# Altium PCB SKC_PCB.PcbDoc (part 3 of 3)
Units mm, origin at the board's own origin, x right, y up, seen from the top; angles counter-clockwise.
Board outline 160.02 x 100.08 mm, 2 copper layers (Top Layer, Bottom Layer); 399 components, 429 nets, 1319 pads, 182 vias.
Unrouted connection lines stored in the file: 43.
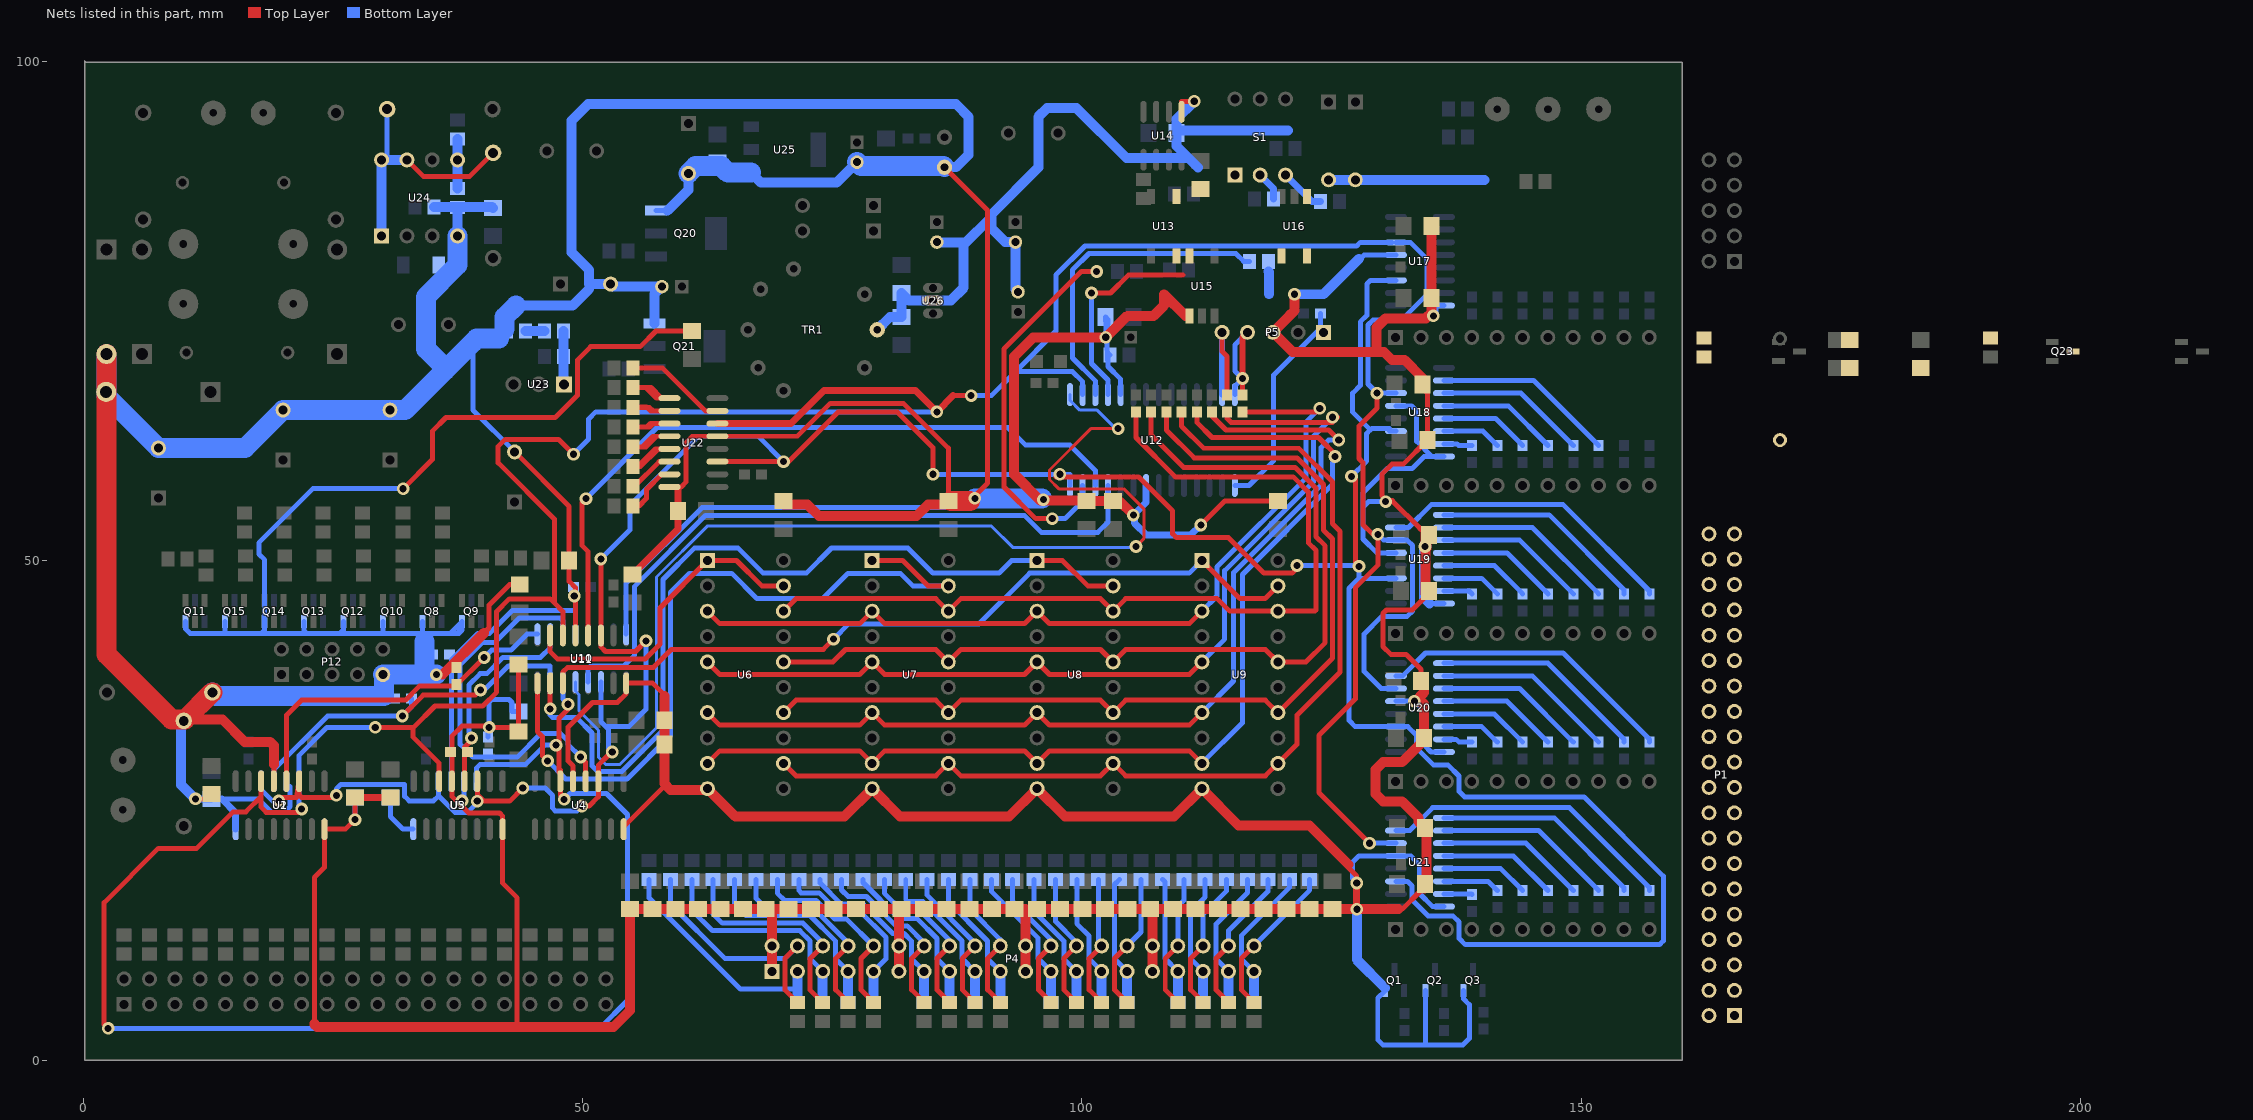
[diagram p3: the nets of this part, all layers, seen from the top]

## Via types
v1: diameter 1.27, hole 0.711, Top Layer to Bottom Layer, 182 vias

## Nets (pads, with @x,y where several pads share a name; then routed paths per layer and width w, separated by ;. In a path a pad name is that pad's centre, name@x,y a point inside that pad or via, vN(x,y) a via of type N, cw(c..) or ccw(c..) an arc to the next point about the centre after c; other vN are vias at no path point) (continued)
NetR147_1: R147.1 U18.2 | length 18.2
  Bottom Layer w0.5: U18.2@136.258,68.072 145.249,68.072 R147.1@151.765,61.556
NetR149_1: R149.1 U18.3 | length 15.1
  Bottom Layer w0.5: U18.3@136.258,66.802 143.979,66.802 R149.1@149.225,61.556
NetR150_1: R150.1 U18.4 | length 12.1
  Bottom Layer w0.5: U18.4@136.258,65.532 142.709,65.532 R150.1@146.685,61.556
NetR151_1: R151.1 U18.5 | length 9
  Bottom Layer w0.5: U18.5@136.258,64.262 141.439,64.262 R151.1@144.145,61.556
NetR152_1: R152.1 U18.6 | length 5.9
  Bottom Layer w0.5: U18.6@136.258,62.992 140.169,62.992 R152.1@141.605,61.556
NetR153_1: R153.1 U18.7 | length 2.9
  Bottom Layer w0.5: U18.7@136.258,61.722 137.566,61.722 137.732,61.556 R153.1@139.065,61.556
NetR154_1: R154.1 U19.15 | length 30.2
  Bottom Layer w0.5: U19.15@131.458,53.34 132.715,53.34 135.001,55.626 148.209,55.626 156.845,46.99 R154.1@156.845,46.697
NetR155_1: R155.1 U19.1 | length 21.6
  Bottom Layer w0.5: U19.1@136.258,54.61 146.812,54.61 154.305,47.117 R155.1@154.305,46.697
NetR156_1: R156.1 U19.2 | length 18.3
  Bottom Layer w0.5: U19.2@136.258,53.34 145.122,53.34 R156.1@151.765,46.697
NetR158_1: R158.1 U19.3 | length 15.2
  Bottom Layer w0.5: U19.3@136.258,52.07 143.852,52.07 R158.1@149.225,46.697
NetR159_1: R159.1 U19.4 | length 12.1
  Bottom Layer w0.5: U19.4@136.258,50.8 142.582,50.8 R159.1@146.685,46.697
NetR160_1: R160.1 U19.5 | length 9.1
  Bottom Layer w0.5: U19.5@136.258,49.53 141.312,49.53 R160.1@144.145,46.697
NetR162_1: R162.1 U19.6 | length 6
  Bottom Layer w0.5: U19.6@136.258,48.26 140.042,48.26 R162.1@141.605,46.697
NetR163_1: R163.1 U19.7 | length 2.9
  Bottom Layer w0.5: U19.7@136.258,46.99 138.772,46.99 R163.1@139.065,46.697
NetR164_1: R164.1 U20.15 | length 30.2
  Bottom Layer w0.5: U20.15@131.458,38.481 132.125,38.481 134.411,40.767 148.209,40.767 156.845,32.131 R164.1@156.845,31.838
NetR165_1: R165.1 U20.1 | length 21.5
  Bottom Layer w0.5: U20.1@136.258,39.751 146.685,39.751 154.305,32.131 R165.1@154.305,31.838
NetR166_1: R166.1 U20.2 | length 18.3
  Bottom Layer w0.5: U20.2@136.258,38.481 145.122,38.481 R166.1@151.765,31.838
NetR168_1: R168.1 U20.3 | length 15.2
  Bottom Layer w0.5: U20.3@136.258,37.211 143.852,37.211 R168.1@149.225,31.838
NetR169_1: R169.1 U20.4 | length 12.1
  Bottom Layer w0.5: U20.4@136.258,35.941 142.582,35.941 R169.1@146.685,31.838
NetR170_1: R170.1 U20.5 | length 9.1
  Bottom Layer w0.5: U20.5@136.258,34.671 141.312,34.671 R170.1@144.145,31.838
NetR172_1: R172.1 U20.6 | length 6
  Bottom Layer w0.5: U20.6@136.258,33.401 140.042,33.401 R172.1@141.605,31.838
NetR173_1: R173.1 U20.7 | length 2.9
  Bottom Layer w0.5: U20.7@136.258,32.131 137.49,32.131 137.783,31.838 R173.1@139.065,31.838
NetR174_1: R174.1 U21.15 | length 29.9
  Bottom Layer w0.5: U21.15@131.458,22.987 132.842,22.987 135.128,25.273 148.844,25.273 156.845,17.272 R174.1@156.845,16.979
NetR175_1: R175.1 U21.1 | length 21.2
  Bottom Layer w0.5: U21.1@136.258,24.257 147.32,24.257 154.305,17.272 R175.1@154.305,16.979
NetR176_1: R176.1 U21.2 | length 18
  Bottom Layer w0.5: U21.2@136.258,22.987 145.757,22.987 R176.1@151.765,16.979
NetR178_1: R178.1 U21.3 | length 14.9
  Bottom Layer w0.5: U21.3@136.258,21.717 144.487,21.717 R178.1@149.225,16.979
NetR179_1: R179.1 U21.4 | length 11.9
  Bottom Layer w0.5: U21.4@136.258,20.447 143.217,20.447 R179.1@146.685,16.979
NetR180_1: R180.1 U21.5 | length 8.8
  Bottom Layer w0.5: U21.5@136.258,19.177 141.947,19.177 R180.1@144.145,16.979
NetR182_1: R182.1 U21.6 | length 5.7
  Bottom Layer w0.5: U21.6@136.258,17.907 140.677,17.907 R182.1@141.605,16.979
NetR183_1: R183.1 U21.7 | length 2.8
  Bottom Layer w0.5: U21.7@136.258,16.637 139.026,16.637 R183.1@139.065,16.598
NetR192_2: R192.2 U22.15 | length 10.2
  Top Layer w0.5: R192.2@55.052,69.342 57.964,69.342 62.282,65.024 62.611,65.024 U22.15@63.487,65.024
NetR194_2: R194.2 U22.1 | length 6.4
  Top Layer w0.5: R194.2@55.052,67.364 56.312,67.364 ; U22.1@58.179,66.294 U22.1@57.912,66.294 ; U22.1@58.687,66.294 U22.1@57.912,66.294 ; 56.312,67.364 57.382,66.294 U22.1@57.912,66.294 ; 56.312,67.364 56.842,67.364 U22.1@57.912,66.294
NetR196_2: R196.2 U22.2 | length 5.9
  Top Layer w0.5: U22.2@58.687,65.024 58.179,65.024 57.03,65.024 ; 56.406,65.387 R196.2@55.052,65.387 55.07,65.405 56.388,65.405 56.406,65.387 ; 56.406,65.387 56.667,65.387 57.03,65.024 ; 56.406,65.387 56.769,65.024 57.03,65.024
NetR199_2: R199.2 U22.3 | length 4.5
  Top Layer w0.5: R199.2@55.052,63.409 56.424,63.409 ; U22.3@58.687,63.754 58.179,63.754 57.038,63.754 ; 56.424,63.409 56.769,63.754 57.038,63.754 ; 56.424,63.409 56.693,63.409 57.038,63.754
NetR201_2: R201.2 U22.4 | length 5.9
  Top Layer w0.5: R201.2@55.052,61.432 55.971,61.432 ; U22.4@58.687,62.484 58.179,62.484 57.389,62.484 ; 55.971,61.432 57.023,62.484 57.389,62.484 ; 55.971,61.432 56.337,61.432 57.389,62.484
NetR203_2: R203.2 U22.5 | length 7.2
  Top Layer w0.5: R203.2@55.052,59.454 R203.2@55.517,59.454 ; R203.2@55.435,59.372 R203.2@55.517,59.454 ; U22.5@58.687,61.214 58.179,61.214 57.531,61.214 ; R203.2@55.517,59.454 55.771,59.454 57.531,61.214 ; R203.2@55.517,59.454 57.277,61.214 57.531,61.214
NetR205_2: R205.2 U22.6 | length 5.4
  Top Layer w0.5: R205.2@55.052,57.477 R205.2@55.187,57.477 ; R205.2@55.341,57.477 R205.2@55.187,57.477 ; U22.6@57.809,59.944 U22.6@58.687,59.944 ; U22.6@58.42,59.944 57.655,59.944 R205.2@55.187,57.477
NetR207_2: R207.2 U22.7 | length 5.5
  Top Layer w0.5: R207.2@55.052,55.499 55.626,55.499 56.388,56.261 56.388,57.15 57.912,58.674 U22.7@58.687,58.674
NetR210_2: R210.2 R211.2 U23.1 | length 5.4
  Bottom Layer w1: R211.2@48.067,73.025 R210.2@48.067,70.485 48.067,67.757 U23.1@48.133,67.691
NetR211_1: R211.1 R213.2 | length 1.9
  Bottom Layer w1: R213.2@44.257,73.025 R211.1@46.167,73.025
NetR214_2: R214.2 R215.2 U24.1 U24.7 U24.8 | length 25.8
  Top Layer w0.5: U24.7@32.385,90.17 34.036,88.519 38.667,88.519 R214.2@41.021,90.873
  Bottom Layer w0.5: U24.8@29.845,90.17 30.412,90.737 R215.2@30.412,95.25
  Bottom Layer w1: U24.1@29.845,82.55 U24.8@29.845,90.17 U24.7@32.385,90.17
NetR216_1: R216.1 R217.2 U24.5 | length 5
  Bottom Layer w1: R217.2@37.465,87.31 U24.5@37.465,90.17 R216.1@37.465,92.268
NetR228_1: R228.1 U16.1 | length 2.3
  Bottom Layer w1: 118.679,78.994 118.745,78.928 118.745,76.708
NetR230_2: R230.2 S1.3 | length 4.6
  Bottom Layer w0.7: S1.3@120.396,88.646 123.063,85.979 R230.2@123.891,85.979
NetR231_1: R231.1 S1.2 | length 3
  Bottom Layer w0.7: S1.2@117.856,88.646 119.187,87.315 R231.1@119.187,86.233
NetR232_2: R232.2 S1.1
SEN_FEEDER1_MIN: P1.20
SH1_LATCH: U10.12 U12.11 | length 68.6
  Bottom Layer w0.5: U10.12@50.546,37.859 50.546,39.218 50.8,39.472 54.115,39.472 55.198,40.555 55.198,47.451 62.302,54.555 94.23,54.555 95.928,52.857 101.6,52.857 102.616,53.873 U12.11@102.616,57.553
SH1_OE: U10.13 U12.15 | length 112.8
  Top Layer w0.3: v1(103.632,63.246) 100.893,63.246 96.751,59.104 96.751,58.153 97.69,57.214 104.191,57.214 106.195,55.21 106.195,52.22 v1(105.41,51.435)
  Bottom Layer w0.3: U10.13@49.276,37.859 49.276,36.957 49.634,36.599 49.634,34.984 51.585,33.033 51.585,30.33 52.324,29.591 53.685,29.591 57.376,33.282 57.376,48.395 62.463,53.482 90.947,53.482 93.064,51.365 105.213,51.365 v1@105.283,51.435 ; U12.15@98.806,66.653 98.806,66.077 99.784,65.099 101.525,65.099 v1@103.378,63.246
SH2_LATCH: U11.12 U12.12 | length 71.4
  Top Layer w0.5: v1(50.317,56.236) 49.911,55.829 49.911,51.562 50.546,50.927 U11.12@50.546,42.532
  Bottom Layer w0.5: v1(50.317,56.236) 57.44,63.358 92.598,63.358 94.361,61.595 98.806,61.595 101.346,59.055 U12.12@101.346,57.553
SH_CLK: U1.11 U2.11 U3.11 U4.11 U5.11 U10.11 U11.11 U12.14 U17.11 U18.11 U19.11 U20.11 U21.11 U22.11 | length 325.5
  Top Layer w0.5: v1(19.558,25.959) 19.888,26.289 21.336,26.289 U2.11@21.59,27.927 21.59,26.568 21.844,26.314 25.121,26.314 v1(25.324,26.518) ; v1(39.433,25.933) 39.433,26.632 ; U3.11@39.433,27.927 39.433,26.632 ; v1(43.993,27.254) 42.672,25.933 40.132,25.933 39.433,26.632 ; v1(49.911,25.451) 50.648,25.451 51.562,26.365 U4.11@51.562,27.927 51.562,29.544 52.578,30.56 v1@52.578,30.988 ; v1(51.816,50.19) U11.11@51.816,42.532 51.816,41.385 52.273,40.928 55.279,40.928 v1(56.337,41.986) ; U22.11@63.487,59.944 v1(70.104,59.944) 70.612,59.944 75.565,64.897 81.534,64.897 85.09,61.341 v1(85.09,58.674) ; v1(97.79,58.674) 97.663,58.674 97.409,58.42 105.664,58.42 109.093,54.991 109.093,52.705 109.474,52.324 114.681,52.324 118.237,48.768 121.056,48.768 121.564,49.276 121.539,49.301 v1(121.539,49.53) ; v1(127,58.471) 127.084,58.471 127.389,58.166 127.389,49.827 v1(127.762,49.454)
  Bottom Layer w0.5: U1.11@17.78,27.927 17.78,27.085 18.906,25.959 v1(19.558,25.959) ; v1(25.324,26.518) 25.324,27.153 25.781,27.61 32.156,27.61 32.156,26.416 32.614,25.959 35.052,25.959 35.56,26.467 ; U5.11@35.56,27.927 35.56,26.467 ; v1(39.433,25.933) 39.433,25.785 38.468,24.82 37.182,24.82 35.56,26.467 ; v1(43.993,27.254) 46.228,27.254 46.99,26.492 46.99,25.222 47.244,24.968 49.428,24.968 v1(49.911,25.451) ; U10.11@51.816,37.859 51.816,33.909 52.578,33.147 52.578,31.242 v1(52.959,30.861) ; v1(51.816,50.19) 54.717,53.091 54.717,55.568 61.633,62.484 67.564,62.484 v1(70.104,59.944) ; 52.324,33.401 54.61,33.401 56.337,35.128 v1(56.337,41.986) ; v1(85.09,58.674) 98.806,58.674 U12.14@98.806,57.553 ; v1(121.539,49.53) 121.539,49.301 121.768,49.53 v1@127.762,49.53 ; v1(127,58.471) 128.524,59.995 128.524,62.763 128.892,63.132 127.127,64.897 127.127,66.802 127.889,67.564 127.889,73.939 128.553,74.603 128.553,77.753 128.905,78.105 U17.11@131.458,78.105 ; v1@127.737,49.454 v1(127.762,49.454) 127.762,48.26 ; 129.032,63.271 130.81,63.271 130.81,62.992 U18.11@131.458,62.992 ; U21.11@131.458,17.907 132.605,17.907 133.062,17.45 133.062,16.052 134.661,14.453 137.16,14.453 137.77,13.843 137.77,12.192 138.405,11.557 157.861,11.557 158.242,11.938 158.242,18.415 150.292,26.365 138.328,26.365 137.77,26.924 137.77,28.448 136.652,29.566 135.205,29.566 133.528,31.242 133.528,32.512 132.639,33.401 U20.11@131.458,33.401 127.373,33.401 126.746,34.028 126.746,47.244 127.762,48.26 ; U19.11@131.458,48.26 127.762,48.26
SH_DATA: U1.14 U2.14 U3.14 U4.14 U5.14 U10.14 U11.14 U12.16 U17.14 U18.14 U19.14 U20.14 U21.14 U22.14 | length 452.3
  Top Layer w0.5: v1(2.458,3.175) 2.056,3.577 2.056,15.772 7.493,21.209 11.322,21.209 14.98,24.867 16.256,24.867 17.78,26.391 ; U2.14@17.78,27.927 17.78,26.391 ; v1(21.844,25.146) 21.514,24.816 18.288,24.816 17.78,25.324 17.78,26.391 ; v1(29.21,33.325) 33.071,33.325 ; U3.14@35.623,27.927 35.623,29.731 33.02,32.334 33.02,33.274 33.071,33.325 ; v1(47.32,31.547) 47.371,31.496 47.117,31.496 v1@47.621,30.992 ; U11.14@48.006,42.532 48.006,44.933 47.18,45.758 ; v1(48.133,26.111) 47.752,26.492 U4.14@47.752,27.927 U4.14@47.752,28.727 ; v1(48.514,35.636) 48.514,35.128 47.621,34.235 v1@47.621,30.992 ; v1(49.073,60.681) 47.574,62.179 42.24,62.179 41.529,61.468 41.529,59.817 47.168,54.178 47.18,45.758 ; 87.097,66.548 v1(88.9,66.548) ; v1(128.809,21.717) 123.727,26.798 123.727,32.516 127.381,36.17 127.381,47.308 129.642,49.569 v1(129.642,52.654) 129.134,52.654 128.143,53.645 128.143,59.859 127.754,60.249 127.754,63.492 129.565,65.303 v1(129.565,66.802) ; 33.071,33.325 35.204,35.458 39.98,35.458 41.377,36.855 41.377,44.929 42.65,46.203 46.736,46.203 47.18,45.758 ; 47.621,29.202 47.752,29.071 U4.14@47.752,28.727 ; 47.621,29.202 47.621,28.858 U4.14@47.752,28.727 ; 47.621,29.202 v1@47.621,30.992
  Top Layer w0.7: U22.14@63.487,63.754 70.866,63.754 74.168,67.056 83.337,67.056 v1(85.471,64.922) 87.097,66.548
  Bottom Layer w0.5: v1(2.458,3.175) 51.689,3.175 54.483,5.969 54.483,24.587 52.375,26.695 48.717,26.695 v1(48.133,26.111) ; v1(21.844,25.146) 21.59,25.4 U1.14@21.59,27.927 21.59,30.531 24.384,33.325 v1(29.21,33.325) ; U5.14@39.37,27.927 39.37,29.277 39.684,29.591 44.24,29.591 46.196,31.547 v1(47.32,31.547) v1@47.371,31.496 ; U10.14@48.006,37.859 48.006,36.144 v1(48.514,35.636) ; v1(49.073,60.681) 50.597,62.205 50.597,64.211 51.308,64.922 v1(85.471,64.922) ; v1(88.9,66.548) 90.932,66.548 93.345,68.961 ; U12.16@100.076,66.653 100.076,67.945 99.06,68.961 93.345,68.961 ; v1(128.809,21.717) U21.14@131.458,21.717 ; v1(129.642,52.654) 130.226,52.07 U19.14@131.458,52.07 132.588,52.07 133.125,51.533 133.125,44.987 132.588,44.45 130.048,44.45 128.27,42.672 128.27,38.913 129.972,37.211 U20.14@131.458,37.211 ; U17.14@131.064,81.915 127.889,81.915 127.524,81.55 100.313,81.55 97.409,78.646 97.409,73.025 93.345,68.961 ; U18.14@131.458,66.802 v1(129.565,66.802) 128.651,67.716 128.651,73.635 129.167,74.151 132.037,74.151 134.586,76.699 134.586,80.222 132.893,81.915 U17.14@131.458,81.915
SIG1_LATCH: R226.1 U1.12 U10.15 | length 36.9
  Top Layer w0.5: v1(31.928,34.468) 34.011,36.551 39.243,36.551 v1(39.751,37.059)
  Bottom Layer w0.5: U1.12@19.05,27.927 19.05,29.063 24.455,34.468 v1(31.928,34.468) 32.854,35.394 R226.1@32.854,36.195 ; v1(39.751,37.059) 40.132,37.059 42.545,39.472 46.736,39.472 U10.15@46.736,37.859
SIG2_LATCH: R225.1 U2.12 U10.1 | length 35.1
  Top Layer w0.5: U2.12@20.32,27.927 20.32,34.54 21.844,36.064 32.254,36.064 33.635,37.445 37.242,37.445 v1(40.123,40.326)
  Bottom Layer w0.5: v1(40.123,40.326) 40.869,41.072 42.824,41.072 44.412,42.659 U10.1@45.466,42.659
SIG3_LATCH: R224.1 U3.12 U10.2 | length 21.8
  Top Layer w0.5: U3.12@38.163,27.927 38.163,31.331 39.091,32.258 v1(38.862,32.258)
  Bottom Layer w0.5: v1(38.862,32.258) 39.091,32.258 39.141,32.309 38.612,32.838 38.612,37.592 39.726,38.706 40.388,38.706 42.001,40.318 45.753,40.318 46.736,41.3 U10.2@46.736,42.659
SIG4_LATCH: R223.1 U4.12 U10.3 | length 39
  Top Layer w0.5: v1(49.784,30.353) 50.292,29.845 U4.12@50.292,27.927
  Bottom Layer w0.5: U10.3@48.006,42.659 48.006,44.018 47.752,44.272 43.647,44.272 41.208,41.834 39.976,41.834 37.723,39.581 37.723,31.619 38.997,30.345 39.372,30.345 43.426,30.345 45.767,32.686 47.792,32.686 48.51,31.968 48.51,31.627 v1(49.784,30.353)
SIG5_LATCH: R222.1 U5.12 U10.4 | length 28.9
  Bottom Layer w0.5: U5.12@36.83,27.927 36.83,40.081 39.497,42.748 40.665,42.748 42.943,45.026 49.149,45.026 49.276,44.899 U10.4@49.276,42.659
SIG_ALARM: P1.4
SIG_CLEANING_MODE: P1.3
SIG_CYCLON_FULL: P1.40
SIG_DOSER1_AUTO: P1.5
SIG_DOSER1_MANUAL: P1.6
SIG_DOSER2_AUTO: P1.7
SIG_DOSER2_MANUAL: P1.8
SIG_DOSER3_AUTO: P1.9
SIG_DOSER3_MANUAL: P1.10
SIG_DOSER4_AUTO: P1.11
SIG_DOSER4_MANUAL: P1.12
SIG_EKSTRUDER_RUN: P1.36
SIG_FEEDER1_FULL: P1.18
SIG_FEEDER1_ON: P1.13
SIG_FEEDER1_REQUEST: P1.19
SIG_FEEDER1_VACUM: P1.17
SIG_FEEDER2_FULL: P1.22
SIG_FEEDER2_MIN: P1.24
SIG_FEEDER2_ON: P1.14
SIG_FEEDER2_REQUEST: P1.23
SIG_FEEDER2_VACUM: P1.21
SIG_FEEDER3_FULL: P1.26
SIG_FEEDER3_MIN: P1.28
SIG_FEEDER3_ON: P1.15
SIG_FEEDER3_REQUEST: P1.27
SIG_FEEDER3_VACUM: P1.25
SIG_FEEDER4_FULL: P1.30
SIG_FEEDER4_MIN: P1.32
SIG_FEEDER4_ON: P1.16
SIG_FEEDER4_REQUEST: P1.31
SIG_FEEDER4_VACUM: P1.29
SIG_MIKSER_FULL: P1.34
SIG_MIKSER_MIN: P1.35
SIG_MIKSER_RUN: P1.33
SIG_START: P1.1
SIG_STOP: P1.2
SIG_VACUM_PUMP1_RUN: P1.37
SIG_VACUM_PUMP2_RUN: P1.38
SIG_VACUM_PUMP3_RUN: P1.39
SKC_DATA0: R114.2 U6.18 U7.18 U8.18 U9.18 | length 90.8
  Top Layer w0.5: U6.18@70.104,44.958 71.358,46.212 85.36,46.212 U7.18@86.614,44.958 87.868,46.212 101.87,46.212 U8.18@103.124,44.958 104.378,46.212 113.554,46.212 114.808,44.958 U9.18@119.634,44.958 123.334,44.958 123.465,45.089 123.465,51.033 122.682,51.816 122.682,56.896 121.158,58.42 109.347,58.42 105.41,62.357 R114.2@105.41,64.936
SKC_DATA1: R115.2 U6.16 U7.16 U8.16 U9.16 | length 95.1
  Top Layer w0.5: U6.16@70.104,39.878 75.057,39.878 76.311,41.132 85.36,41.132 U7.16@86.614,39.878 87.868,41.132 101.87,41.132 U8.16@103.124,39.878 104.378,41.132 118.38,41.132 U9.16@119.634,39.878 122.428,39.878 124.359,41.809 124.359,51.516 123.444,52.431 123.444,57.277 121.347,59.374 110.171,59.374 106.934,62.611 R115.2@106.934,64.936
SKC_DATA2: R117.2 U6.14 U7.14 U8.14 U9.14 | length 98
  Top Layer w0.5: U6.14@70.104,34.798 71.358,36.052 85.36,36.052 U7.14@86.614,34.798 87.868,36.052 101.87,36.052 U8.14@103.124,34.798 104.378,36.052 118.38,36.052 U9.14@119.634,34.798 125.113,40.277 125.113,52.176 ; R117.2@108.458,64.936 108.458,63.119 111.249,60.328 121.536,60.328 124.206,57.658 124.206,53.084 125.098,52.192
SKC_DATA3: R118.2 U6.12 U7.12 U8.12 U9.12 | length 102.6
  Top Layer w0.5: U6.12@70.104,29.718 71.358,28.464 85.36,28.464 U7.12@86.614,29.718 87.868,28.464 101.87,28.464 U8.12@103.124,29.718 104.378,28.464 118.38,28.464 U9.12@119.634,29.718 121.539,31.623 121.539,34.544 125.867,38.872 125.867,52.949 125.095,53.721 125.095,57.912 121.725,61.282 112.2,61.282 109.982,63.5 R118.2@109.982,64.936
SKC_DATA4: R119.2 U6.9 U7.9 U8.9 U9.9 | length 107.8
  Top Layer w0.5: U6.9@62.484,29.718 63.738,30.972 77.74,30.972 U7.9@78.994,29.718 80.248,30.972 94.25,30.972 U8.9@95.504,29.718 96.758,30.972 110.76,30.972 U9.9@112.014,29.718 ; R119.2@111.506,64.936 111.506,63.881 ; v1@125.603,60.452 125.666,60.389 123.69,62.365 113.022,62.365 ; 111.506,63.881 113.022,62.365 ; 111.506,63.881 113.022,62.365
  Bottom Layer w0.5: U9.9@112.014,29.718 116.078,33.782 116.078,48.641 125.107,57.67 125.107,59.829 v1@125.646,60.368
  other v1: 125.349,60.452
SKC_DATA5: R120.2 U6.7 U7.7 U8.7 U9.7 | length 100.3
  Top Layer w0.5: U6.7@62.484,34.798 63.738,33.544 77.74,33.544 U7.7@78.994,34.798 80.248,33.544 94.25,33.544 U8.7@95.504,34.798 96.758,33.544 110.76,33.544 U9.7@112.014,34.798 ; R120.2@113.03,64.936 113.03,64.516 114.427,63.119 124.714,63.119 v1(125.73,62.103)
  Bottom Layer w0.5: U9.7@112.014,34.798 115.189,37.973 115.189,48.818 123.952,57.581 123.952,61.341 124.714,62.103 v1(125.73,62.103)
SKC_DATA6: R121.2 U6.5 U7.5 U8.5 U9.5 | length 95.4
  Top Layer w0.5: U6.5@62.484,39.878 63.738,38.624 77.74,38.624 U7.5@78.994,39.878 80.248,38.624 94.25,38.624 U8.5@95.504,39.878 96.758,38.624 110.76,38.624 U9.5@112.014,39.878 ; R121.2@114.554,64.936 114.554,64.262 114.935,63.881 124.587,63.881 ; v1(125.095,64.389) 124.587,63.881 ; v1@125.603,64.389 125.095,63.881 124.587,63.881
  Bottom Layer w0.5: U9.5@112.014,39.878 114.292,42.156 114.292,49.014 123.19,57.912 123.19,62.484 v1(125.095,64.389)
SKC_DATA7: R122.2 U6.3 U7.3 U8.3 U9.3 | length 85.7
  Top Layer w0.5: U6.3@62.484,44.958 63.738,43.704 77.74,43.704 U7.3@78.994,44.958 80.248,43.704 94.25,43.704 U8.3@95.504,44.958 96.758,43.704 110.76,43.704 U9.3@112.014,44.958 ; R122.2@116.078,64.936 123.483,64.936 v1(123.825,65.278)
  Bottom Layer w0.5: U9.3@112.014,44.958 113.538,46.482 113.538,49.403 122.428,58.293 122.428,63.881 v1(123.825,65.278)
SKC_DATA_DIR: R126.2 U12.13 | length 37.8
  Top Layer w0.5: v1(97.028,54.229) 95.377,54.229 92.202,57.404 92.202,71.247 99.949,78.994 v1(101.473,78.994)
  Bottom Layer w0.5: v1(97.028,54.229) 98.298,54.229 100.076,56.007 U12.13@100.076,57.553
SKC_DATA_RX: Q23.3 R133.2 U12.18 | length 20.8
  Top Layer w0.5: v1(100.965,76.835) 102.87,76.835 104.648,78.613 110.13,78.613
  Bottom Layer w0.5: v1(100.965,76.835) 100.965,69.771 102.616,68.12 U12.18@102.616,66.653
SKC_DATA_TX: R228.2 U12.17 | length 32.2
  Bottom Layer w0.5: U12.17@101.346,66.653 101.346,68.041 99.06,70.327 99.06,79.153 100.702,80.795 115.42,80.795 116.205,80.01 R228.2@116.779,80.01
SKC_ICSP_PGC: P5.5 R121.1 U12.27 | length 12.7
  Top Layer w0.5: P5.5@114.046,72.898 114.046,70.981 114.554,70.473 114.554,68.58 R121.1@114.554,66.636
  Bottom Layer w0.6: U12.27@114.046,66.653 P5.5@114.046,72.898
SKC_ICSP_PGD: P5.4 R122.1 U12.28 | length 13.9
  Top Layer w0.5: R122.1@116.078,66.636 v1(116.078,68.261)
  Top Layer w0.6: v1(116.078,68.261) 116.078,69.977 116.078,72.39 P5.4@116.586,72.898
  Bottom Layer w0.5: U12.28@115.316,66.653 115.316,67.499 v1(116.078,68.261) 115.316,69.023 115.316,71.628 P5.4@116.586,72.898
SKC_ICSP_VPP: P5.1 R123.2 U12.1 | length 22.2
  Bottom Layer w0.5: U12.1@115.316,57.553 116.735,57.553 119.211,60.029 119.211,68.628 P5.1@123.913,73.33 ; R123.2@123.913,74.803 P5.1@123.913,73.33 ; P5.1@124.206,72.898 P5.1@123.913,73.33
SKC_INPUT_1_8: U6.1 U6.19 U11.15 | length 32.6
  Top Layer w0.5: U11.15@46.736,42.532 46.736,40.913 47.491,40.157 56.236,40.157 57.734,41.656 57.734,45.288 U6.1@62.484,50.038 65.405,50.038 67.945,47.498 U6.19@70.104,47.498
SKC_INPUT_9_16: U7.1 U7.19 U11.1 | length 77.3
  Top Layer w0.5: U11.1@45.466,37.732 45.466,32.893 45.974,32.385 45.974,30.48 v1(46.482,29.972) ; U7.1@78.994,50.038 82.042,50.038 84.582,47.498 U7.19@86.614,47.498
  Bottom Layer w0.5: v1(46.482,29.972) 48.295,28.159 54.448,28.159 58.793,32.504 58.793,46.855 60.69,48.752 64.913,48.752 67.437,46.228 74.041,46.228 76.565,48.752 81.804,48.752 83.058,47.498 U7.19@86.614,47.498
SKC_INPUT_17_24: U8.1 U8.19 U11.2 | length 86.7
  Top Layer w0.5: v1(46.736,35.179) U11.2@46.736,37.732 ; U8.1@95.504,50.038 98.044,50.038 100.584,47.498 U8.19@103.124,47.498
  Bottom Layer w0.5: v1(46.736,35.179) 46.736,34.544 46.99,34.29 49.403,34.29 50.931,32.762 50.931,29.464 51.482,28.913 53.932,28.913 58.039,33.02 58.039,48.133 61.214,51.308 65.532,51.308 68.072,48.768 72.39,48.768 74.914,51.292 82.566,51.292 85.09,48.768 91.694,48.768 92.964,50.038 U8.1@95.504,50.038
SKC_INPUT_25_32: U9.1 U9.19 U11.3 | length 79.1
  Top Layer w0.5: U11.3@48.006,38.1 48.006,38.862 48.483,39.339 57.085,39.339 58.893,41.148 74.092,41.148 v1(75.108,42.164) ; U9.1@112.014,50.038 115.824,46.228 118.364,46.228 U9.19@119.634,47.498
  Bottom Layer w0.5: v1(75.108,42.164) 76.632,43.688 89.687,43.688 94.767,48.768 110.744,48.768 U9.1@112.014,50.038
SW_AUX0: P4.38 R100.1 R109.1 | length 15
  Top Layer w0.5: R100.1@114.681,5.776 113.427,7.03 113.427,10.176 P4.38@114.681,11.43
  Bottom Layer w0.5: P4.38@114.681,11.43 114.681,12.954 118.618,16.891 R109.1@118.618,18.1
SW_AUX1: P4.39 R101.1 R110.1 | length 14.8
  Bottom Layer w0.5: P4.39@117.221,8.89 115.967,10.144 115.967,12.462 120.777,17.272 R110.1@120.777,18.1
  Bottom Layer w1: R101.1@117.221,5.776 P4.39@117.221,8.89
SW_AUX2: P4.40 R102.1 R111.1 | length 15.7
  Top Layer w0.5: R102.1@117.221,5.776 115.967,7.03 115.967,10.176 P4.40@117.221,11.43
  Bottom Layer w0.5: P4.40@117.221,11.43 122.809,17.018 R111.1@122.809,18.1
SW_CLEANING_MODE: P4.27 R83.1 R92.1 | length 13.4
  Bottom Layer w0.5: R92.1@99.494,18.1 99.494,13.663 100.727,12.43 100.727,10.144 P4.27@101.981,8.89
  Bottom Layer w1: R83.1@101.981,5.776 P4.27@101.981,8.89
SW_DOSER1_AUTO: P4.29 R85.1 R94.1 | length 13.1
  Bottom Layer w0.5: R94.1@103.779,18.1 103.267,17.588 103.267,10.144 P4.29@104.521,8.89
  Bottom Layer w1: R85.1@104.521,5.776 P4.29@104.521,8.89
SW_DOSER1_MANUAL: P4.28 R84.1 R93.1 | length 13.5
  Top Layer w0.5: R84.1@101.981,5.776 100.727,7.03 100.727,10.176 P4.28@101.981,11.43
  Bottom Layer w0.5: R93.1@101.637,18.1 101.637,11.774 P4.28@101.981,11.43
SW_DOSER2_AUTO: P4.33 R103.1 R104.1 | length 13
  Bottom Layer w0.5: R104.1@108.065,18.1 108.315,17.85 108.315,10.176 P4.33@109.601,8.89
  Bottom Layer w1: R103.1@109.601,5.776 P4.33@109.601,8.89
SW_DOSER2_MANUAL: P4.30 R86.1 R95.1 | length 13.9
  Top Layer w0.5: R86.1@104.521,5.776 103.267,7.03 103.267,10.176 P4.30@104.521,11.43
  Bottom Layer w0.5: P4.30@104.521,11.43 105.922,12.831 R95.1@105.922,18.1
SW_DOSER3_AUTO: P4.35 R97.1 R106.1 | length 13.4
  Bottom Layer w0.5: P4.35@112.141,8.89 110.887,10.144 110.887,14.875 112.35,16.338 R106.1@112.35,18.1
  Bottom Layer w1: R97.1@112.141,5.776 P4.35@112.141,8.89
SW_DOSER3_MANUAL: P4.34 R96.1 R105.1 | length 13.6
  Top Layer w0.5: R96.1@109.601,5.776 108.347,7.03 108.347,10.176 P4.34@109.601,11.43
  Bottom Layer w0.5: P4.34@109.601,11.43 109.601,15.367 110.207,15.973 R105.1@110.207,18.1
SW_DOSER4_AUTO: P4.37 R99.1 R108.1 | length 14.2
  Bottom Layer w0.5: P4.37@114.681,8.89 113.427,10.144 113.427,13.605 116.586,16.764 R108.1@116.586,18.1
  Bottom Layer w1: R99.1@114.681,5.776 P4.37@114.681,8.89
SW_DOSER4_MANUAL: P4.36 R98.1 R107.1 | length 14.3
  Top Layer w0.5: R98.1@112.141,5.776 110.887,7.03 110.887,10.176 P4.36@112.141,11.43
  Bottom Layer w0.5: P4.36@112.141,11.43 112.141,14.605 114.493,16.957 R107.1@114.493,18.1
TST_DOSER1_SPEED_DN: P4.13 R71.1 R72.1 | length 18.6
  Bottom Layer w0.5: R72.1@73.783,18.1 73.783,17.727 75.889,15.621 78.105,15.621 81.042,12.684 82.18,12.684 82.915,11.949 82.915,10.176 P4.13@84.201,8.89
  Bottom Layer w1: R71.1@84.201,5.776 P4.13@84.201,8.89
TST_DOSER1_SPEED_UP: P4.10 R52.1 R61.1 | length 19.9
  Top Layer w0.5: R52.1@79.121,5.776 77.867,7.03 77.867,10.176 P4.10@79.121,11.43
  Bottom Layer w0.5: R61.1@69.498,18.1 69.498,16.719 70.215,16.002 73.375,16.002 75.264,14.113 76.438,14.113 P4.10@79.121,11.43
TST_DOSER2_SPEED_DN: P4.16 R66.1 R75.1 | length 17.1
  Top Layer w0.5: R66.1@86.741,5.776 85.487,7.03 85.487,10.176 P4.16@86.741,11.43
  Bottom Layer w0.5: R75.1@80.211,18.1 80.211,16.714 81.979,14.946 83.783,14.946 86.741,11.988 P4.16@86.741,11.43
TST_DOSER2_SPEED_UP: P4.15 R65.1 R74.1 | length 17
  Bottom Layer w0.5: R74.1@78.068,18.1 78.068,17.791 81.667,14.192 83.471,14.192 85.487,12.176 85.487,10.144 P4.15@86.741,8.89
  Bottom Layer w1: R65.1@86.741,5.776 P4.15@86.741,8.89
TST_DOSER3_SPEED_DN: P4.19 R69.1 R78.1 | length 14.5
  Bottom Layer w0.5: R78.1@86.639,18.1 86.639,15.846 90.551,11.933 90.551,10.16 P4.19@91.821,8.89
  Bottom Layer w1: R69.1@91.821,5.776 P4.19@91.821,8.89
TST_DOSER3_SPEED_UP: P4.18 R68.1 R77.1 | length 15.3
  Top Layer w0.5: R68.1@89.281,5.776 88.027,7.03 88.027,10.176 P4.18@89.281,11.43
  Bottom Layer w0.5: R77.1@84.496,18.1 84.496,16.515 89.281,11.73 P4.18@89.281,11.43
TST_DOSER4_SPEED_DN: P4.24 R80.1 R89.1 | length 15
  Top Layer w0.5: R80.1@96.901,5.776 95.647,7.03 95.647,10.176 P4.24@96.901,11.43
  Bottom Layer w0.5: R89.1@93.066,18.1 93.066,15.9 96.901,12.065 P4.24@96.901,11.43
TST_DOSER4_SPEED_UP: P4.23 R87.1 R88.1 | length 14.8
  Bottom Layer w0.5: R88.1@90.924,18.1 90.924,16.899 95.615,12.208 95.615,10.176 P4.23@96.901,8.89
  Bottom Layer w1: R87.1@96.901,5.776 P4.23@96.901,8.89
TST_FEEDER1_ON: P4.14 R64.1 R73.1 | length 18.5
  Top Layer w0.5: R64.1@84.201,5.776 82.947,7.03 82.947,10.176 P4.14@84.201,11.43
  Bottom Layer w0.5: R73.1@75.926,18.1 75.926,17.03 76.581,16.375 78.417,16.375 81.354,13.438 82.493,13.438 84.201,11.73 P4.14@84.201,11.43
TST_FEEDER2_ON: P4.17 R67.1 R76.1 | length 16.1
  Bottom Layer w0.5: R76.1@82.353,18.1 82.353,16.072 82.55,15.875 84.069,15.875 87.995,11.949 87.995,10.176 P4.17@89.281,8.89
  Bottom Layer w1: R67.1@89.281,5.776 P4.17@89.281,8.89
TST_FEEDER3_ON: P4.20 R70.1 R79.1 | length 14.6
  Top Layer w0.5: R70.1@91.821,5.776 90.567,7.03 90.567,10.176 P4.20@91.821,11.43
  Bottom Layer w0.5: R79.1@88.781,18.1 88.781,15.105 91.821,12.065 P4.20@91.821,11.43
TST_FEEDER4_ON: P4.25 R81.1 R90.1 | length 14.1
  Bottom Layer w0.5: R90.1@95.209,18.1 95.209,14.9 98.187,11.922 98.187,10.144 P4.25@99.441,8.89
  Bottom Layer w1: R81.1@99.441,5.776 P4.25@99.441,8.89
TST_MIKSER_RUN: P4.26 R82.1 R91.1 | length 14.2
  Top Layer w0.5: R82.1@99.441,5.776 98.187,7.03 98.187,10.176 P4.26@99.441,11.43
  Bottom Layer w0.5: R91.1@97.352,18.1 97.352,13.9 99.441,11.811 P4.26@99.441,11.43
TST_PG_DN: P4.9 R51.1 R60.1 | length 18.8
  Bottom Layer w0.5: R60.1@71.64,18.1 71.64,16.998 71.882,16.756 73.687,16.756 75.576,14.867 77.793,14.867 80.375,12.285 80.375,10.144 P4.9@79.121,8.89
  Bottom Layer w1: R51.1@79.121,5.776 P4.9@79.121,8.89
TST_PG_LOAD: P4.6 R50.1 R59.1 | length 22.6
  Top Layer w0.5: R50.1@74.005,5.776 72.787,6.994 72.787,10.176 P4.6@74.041,11.43
  Bottom Layer w0.5: R59.1@63.07,18.1 63.07,14.622 63.976,13.716 72.055,13.716 74.041,11.73 P4.6@74.041,11.43
TST_PG_SAVE: P4.7 R54.1 R63.1 | length 20.8
  Bottom Layer w0.5: R63.1@65.212,18.1 65.212,15.626 66.36,14.478 72.766,14.478 75.295,11.949 75.295,10.176 P4.7@76.581,8.89
  Bottom Layer w1: R54.1@76.581,5.776 P4.7@76.581,8.89
TST_PG_UP: P4.8 R53.1 R62.1 | length 20
  Top Layer w0.5: R53.1@76.581,5.776 75.327,7.03 75.327,10.176 P4.8@76.581,11.43
  Bottom Layer w0.5: R62.1@67.355,18.1 67.355,16.203 68.318,15.24 73.071,15.24 76.581,11.73 P4.8@76.581,11.43
TST_RESET: P4.5 R49.1 R58.1 | length 22.9
  Bottom Layer w0.5: R58.1@60.927,18.1 60.927,15.019 62.992,12.954 71.75,12.954 72.787,11.917 72.787,10.144 P4.5@74.041,8.89
  Bottom Layer w1: R49.1@74.005,5.776 74.005,8.854 P4.5@74.041,8.89
TST_START: P4.3 R55.1 R56.1 | length 25.4
  Bottom Layer w0.5: R56.1@56.642,18.1 56.642,16.256 65.786,7.112 71.501,7.112 P4.3@71.501,8.89
  Bottom Layer w1: R55.1@71.501,5.776 P4.3@71.501,8.89
TST_STOP: P4.4 R48.1 R57.1 | length 24.7
  Top Layer w0.5: R48.1@71.501,5.776 70.247,7.03 70.247,10.176 P4.4@71.501,11.43
  Bottom Layer w0.5: R57.1@58.785,18.1 58.785,15.637 64.262,10.16 70.231,10.16 P4.4@71.501,11.43
VSS_DC: C54.1 C84.1 C85.1 C86.2 C87.2 C88.2 D2.1 D3.1 R127.1 R134.1 R229.1 R232.1 TR1.7 U13.4 U14.5 U15.3 U16.4 U26.2 | length 99.3
  Top Layer w0.5: U14.5@109.982,94.983 109.982,96.037 v1(111.252,96.037)
  Bottom Layer w0.5: C54.1@109.477,92.837 C54.1@109.731,93.091
  Bottom Layer w1: TR1.7@79.502,73.152 80.775,74.425 C85.1@81.915,74.425 C84.1@81.915,76.832 82.674,76.073 U26.2@85.09,76.073 86.868,76.073 88.154,77.359 88.154,81.677 90.932,84.455 90.932,83.312 92.313,81.931 C86.2@93.345,81.931 93.345,77.2 C87.2@93.599,76.946 ; C88.2@85.455,81.915 88.138,81.915 ; 90.932,84.709 95.631,89.408 95.631,94.488 96.52,95.377 99.441,95.377 104.457,90.361 110.68,90.361 ; C54.1@109.731,93.091 120.65,93.091 ; v1(111.252,96.037) 109.477,94.262 C54.1@109.477,92.837 109.477,91.564 110.68,90.361 ; 111.636,89.405 110.68,90.361 ; D3.1@124.714,88.175 D2.1@127.381,88.175 140.335,88.136
VSS_SKC: C1.2 C2.1 C3.2 C4.1 C5.2 C6.1 C7.2 C8.1 C9.2 C10.1 C11.2 C12.2 C13.2 C14.2 C15.2 C16.1 C17.1 C18.1 C19.1 C20.2 C21.2 C22.2 C23.2 C24.2 C25.1 C26.1 C27.1 C28.1 C29.2 C30.2 C31.2 C32.2 C33.2 C34.1 C35.1 C36.1 C37.1 C38.2 C39.2 C40.2 C41.2 C42.2 C43.1 C44.1 C45.1 C46.1 C47.1 C48.1 C49.1 C50.1 C51.1 C52.2 C53.1 C55.2 C56.1 C57.2 C58.1 C59.2 C60.1 C61.2 C62.1 C63.2 C64.1 C65.1 C66.1 C67.2 C68.2 C71.2 C72.2 C74.1 C76.1 C77.1 C78.2 C79.2 C80.1 C81.2 C82.1 C83.2 D5.1 D7.1 D8.1 D9.1 P4.1 P4.2 P4.11 P4.12 P4.21 P4.22 P4.31 P4.32 P5.3 P12.9 Q1.2 Q2.2 Q3.2 Q8.2 Q9.2 Q10.2 Q11.2 Q12.2 Q13.2 Q14.2 Q15.2 Q20.3 Q21.3 R32.1 R33.2 R133.1 R213.1 R217.1 R221.2 R222.2 R223.2 R224.2 R225.2 R226.2 U1.8 U1.13 U2.8 U2.13 U3.8 U3.13 U4.8 U4.13 U5.8 U5.13 U6.10 U7.10 U8.10 U9.10 U10.8 U11.8 U11.13 U12.8 U12.19 U13.3 U15.4 U16.3 U17.8 U17.13 U18.8 U18.13 U19.8 U19.13 U20.8 U20.13 U21.8 U21.13 U22.8 U22.13 U24.4 U25.1 | length 1303.8
  Top Layer w0.5: R32.1@9.779,34.104 R32.1@10.169,34.104 ; v1(11.201,26.162) 11.204,26.159 C3.2@12.827,26.159 ; U2.13@19.05,27.927 19.05,29.591 ; 23.114,3.683 23.114,18.288 24.13,19.304 U2.8@24.13,23.127 26.226,23.127 v1(27.178,24.079) C4.1@27.178,25.905 ; v1(32.004,57.226) 34.925,60.147 34.925,62.992 36.297,64.364 47.244,64.364 49.454,66.573 49.454,70.104 50.8,71.45 55.753,71.45 57.331,73.028 C65.1@60.96,73.028 ; v1(35.331,38.608) v1@35.941,38.608 ; 40.132,42.799 40.616,43.283 40.616,45.569 42.675,47.628 C5.2@43.688,47.628 ; v1(40.619,33.326) C6.1@43.561,33.326 ; v1@40.619,33.452 37.897,33.452 36.893,32.448 U3.13@36.893,27.927 36.893,26.416 38.57,24.74 41.656,24.74 41.974,24.422 U3.8@41.974,23.127 41.974,17.716 43.434,16.256 43.434,3.302 ; C71.2@43.18,60.92 48.644,55.456 C74.1@48.644,50.038 48.644,47.952 49.276,47.32 U11.13@49.276,42.532 ; C6.1@43.561,32.896 C6.1@43.561,33.326 ; C48.1@43.561,39.621 C6.1@43.561,33.326 ; U4.13@49.022,27.927 49.022,29.468 48.514,29.976 48.514,33.35 50.978,35.814 53.467,35.814 U11.8@54.356,36.703 ; U4.8@54.102,23.127 54.102,23.368 58.169,27.435 ; U11.8@54.356,37.732 54.356,37.744 57.001,37.744 58.169,36.576 ; U22.8@58.687,57.404 59.851,57.404 60.359,57.912 60.359,61.884 60.959,62.484 U22.13@63.487,62.484 71.501,62.484 74.803,65.786 82.118,65.786 86.614,61.29 C20.2@86.614,56.01 C20.2@86.614,55.629 ; D9.1@86.233,89.432 90.551,85.114 90.551,57.785 v1@88.773,56.007 ; 94.361,15.11 C32.2@95.516,15.11 ; 98.908,56.01 100.33,56.01 100.33,56.032 103.124,56.032 C29.2@103.124,56.01 C29.2@103.731,56.01 ; v1(111.912,53.594) 114.328,56.01 C38.2@119.634,56.01 ; 126.703,19.261 127.508,18.455 ; v1@127.508,15.082 v1(127.536,15.11) ; v1(130.429,55.931) 131.166,55.931 133.883,53.213 ; 131.699,15.113 132.08,15.113 133.909,16.942 134.369,16.942 C64.1@134.369,17.653 ; C62.1@133.985,31.874 133.985,32.258 134.245,32.258 C62.1@134.369,32.258 ; C61.2@133.988,37.973 133.988,39.116 132.464,40.64 130.937,40.64 130.15,41.427 130.15,44.733 130.501,45.085 133.096,45.085 134.366,46.355 134.366,46.99 C60.1@134.75,46.99 ; C57.2@134.112,68.047 C57.2@133.756,67.691 ; C57.2@134.115,67.691 C57.2@133.756,67.691 ; C63.2@134.369,23.241 C63.2@134.369,23.492 ; v1@134.75,51.209 C59.2@134.75,52.578 134.518,52.578 133.883,53.213 ; v1@135.004,74.851 135.204,74.651 v1(135.204,74.549) ; C57.2@133.756,67.691 134.623,66.824 C58.1@134.623,62.103 132.203,59.683 131.064,59.683 130.048,58.667 130.048,56.54 130.556,56.032 131.089,56.032 133.883,53.238 133.883,53.213
  Top Layer w0.7: C4.1@27.178,25.905 27.559,26.286 C9.2@30.226,26.286 ; C50.1@54.991,48.644 59.56,53.213 C66.1@59.56,54.991 U22.8@59.56,57.15 ; v1@127.508,15.082 v1@127.508,17.907
  Top Layer w1: R32.1@10.169,34.104 13.902,34.104 16.129,31.877 18.669,31.877 19.05,31.496 19.05,29.591 ; 23.114,3.683 23.114,3.556 23.368,3.302 53.086,3.302 54.737,4.953 C12.2@54.737,15.11 C13.2@57.003,15.11 C14.2@59.268,15.11 C15.2@61.534,15.11 C16.1@63.799,15.11 C17.1@66.065,15.11 C18.1@68.33,15.11 ; v1@35.941,38.608 40.132,42.799 ; 58.169,36.449 58.169,27.683 58.801,27.051 U6.10@62.484,27.051 ; U6.10@62.484,27.178 65.278,24.384 76.2,24.384 U7.10@78.994,27.178 81.788,24.384 92.71,24.384 U8.10@95.504,27.178 98.298,24.384 109.22,24.384 U9.10@112.014,27.178 115.697,23.495 122.809,23.495 126.703,19.601 ; P4.1@68.961,8.89 P4.2@68.961,11.43 68.961,14.479 C18.1@68.33,15.11 ; C11.2@70.104,55.629 72.514,55.629 73.66,54.483 83.439,54.483 84.585,55.629 C20.2@86.614,55.629 ; P4.11@81.661,8.89 P4.12@81.661,11.43 81.661,14.848 C28.1@81.923,15.11 ; P4.21@94.361,8.89 P4.22@94.361,11.43 94.361,15.11 C31.2@93.251,15.11 C30.2@90.985,15.11 C25.1@88.72,15.11 C26.1@86.454,15.11 C27.1@84.189,15.11 C28.1@81.923,15.11 ; C32.2@95.516,15.11 C33.2@97.782,15.11 C37.1@100.047,15.11 C36.1@102.313,15.11 C35.1@104.578,15.11 C34.1@106.844,15.11 ; C47.1@100.33,56.01 C29.2@103.124,56.01 ; C47.1@100.33,56.032 95.86,56.032 93.218,58.674 93.218,70.485 95.123,72.39 C52.2@102.382,72.39 104.541,74.549 107.188,74.549 108.204,75.565 108.204,76.708 110.363,74.549 ; C29.2@103.731,56.01 v1(105.156,54.585) ; P4.31@107.061,8.89 P4.32@107.061,11.43 107.061,14.893 C34.1@106.844,15.11 ; 120.777,74.549 121.285,75.057 ; v1(121.285,76.708) 121.285,75.057 ; v1@127.508,15.113 131.699,15.113 ; v1(127.536,15.11) C43.1@125.095,15.11 C44.1@122.798,15.11 C45.1@120.5,15.11 C46.1@118.203,15.11 C42.2@115.906,15.11 C41.2@113.64,15.11 C40.2@111.375,15.11 C39.2@109.109,15.11 C34.1@106.844,15.11 ; 129.489,71.323 129.489,73.355 130.429,74.295 134.448,74.295 v1@135.004,74.851 ; C62.1@133.985,31.75 132.08,29.845 130.175,29.845 129.413,29.083 129.413,26.67 130.175,25.908 132.08,25.908 133.731,24.257 133.731,23.879 C63.2@134.369,23.241 ; C57.2@134.112,68.047 134.112,68.326 132.331,70.107 131.061,70.107 130.255,70.913 121.111,70.913 P5.3@119.126,72.898 121.285,75.057 ; C57.2@134.115,67.691 C57.2@134.115,67.815 ; C62.1@134.245,32.131 C62.1@134.245,32.134 ; C61.2@134.245,38.354 134.245,36.798 133.35,35.903 134.023,35.903 134.245,35.681 134.245,32.258 C62.1@134.245,32.134 ; C62.1@134.369,32.258 C62.1@134.245,32.134 ; C60.1@134.394,46.736 C59.2@134.394,52.959 ; C64.1@134.496,17.272 C63.2@134.496,23.495 ; C58.1@134.623,61.976 C58.1@134.623,62.103 ; 135.004,75.184 C56.1@135.004,76.327 C55.2@135.004,83.566 ; C18.1@68.33,15.11 C19.1@70.596,15.11 C21.2@72.861,15.11 C22.2@75.127,15.11 C23.2@77.392,15.11 C24.2@79.658,15.11 C28.1@81.923,15.11
  Top Layer w2: D7.1@2.286,70.716 2.286,40.64 8.822,34.104 R32.1@9.779,34.104 ; R32.1@10.169,34.104 R33.2@12.895,36.83 ; C20.2@86.868,56.007 v1@88.773,56.007
  Bottom Layer w0.5: Q11.2@10.226,43.908 10.226,43.175 ; C2.1@12.827,26.159 13.846,26.159 17.492,26.159 18.831,24.82 20.117,24.82 20.697,25.4 20.697,27.425 20.32,27.425 U1.13@20.32,27.927 ; Q15.2@14.181,43.908 14.181,42.733 ; Q13.2@22.091,43.908 22.091,43.009 22.352,42.748 25.654,42.748 26.047,43.141 ; Q12.2@26.047,43.908 26.047,43.141 ; v1(27.178,24.079) C1.2@27.178,26.286 C10.1@30.734,26.286 30.734,24.384 31.991,23.127 U5.8@33.02,23.127 ; Q10.2@30.002,43.908 30.002,42.733 ; v1(32.004,57.226) 22.961,57.226 17.55,51.816 17.55,50.691 18.136,50.105 Q14.2@18.136,43.908 18.136,43.079 17.79,42.733 ; Q8.2@33.957,43.908 33.957,42.733 30.002,42.733 ; 34.163,42.733 36.737,42.733 ; v1(37.897,25.959) 38.1,26.162 U5.13@38.1,27.927 ; R223.2@40.513,32.346 40.513,33.22 v1(40.619,33.326) 40.619,35.839 40.894,36.115 42.61,36.115 42.911,35.814 42.911,34.922 C7.2@43.561,34.922 ; R213.1@42.357,73.025 41.595,72.263 41.214,71.882 38.989,71.882 38.989,65.111 C71.2@43.18,60.92 ; 50.633,77.216 50.633,77.724 ; U10.8@54.356,42.659 54.356,47.752 61.959,55.355 88.375,55.355 v1(89.281,56.261) ; Q20.3@57.325,85.104 58.51,85.104 ; C52.2@102.382,72.39 C52.2@102.464,72.39 ; C53.1@102.809,70.612 102.616,70.805 102.616,69.469 ; U12.19@103.886,66.653 103.886,68.199 102.616,69.469 ; v1@105.283,54.712 106.426,55.855 ; v1@121.285,76.454 v1(121.285,76.708) ; v1(127.533,17.729) 127.102,18.161 127.102,19.812 127.737,20.447 U21.13@131.458,20.447 132.944,20.447 133.816,19.575 133.816,16.679 135.128,15.367 U21.8@136.258,15.367 ; 127.889,80.264 128.27,80.645 U17.13@131.458,80.645 ; Q1.2@130.368,7.223 Q1.2@130.368,6.951 129.633,6.216 129.633,2.032 130.141,1.524 134.432,1.524 ; v1(130.429,55.931) 128.706,55.931 128.147,55.372 ; U20.13@131.458,35.941 v1(133.299,35.941) 134.341,34.9 134.341,31.496 134.976,30.861 U20.8@136.258,30.861 ; U19.13@131.458,50.8 129.54,50.8 128.147,52.193 128.147,55.372 ; U18.13@131.458,65.532 133.02,65.532 133.528,65.024 133.528,61.976 135.052,60.452 ; Q2.2@134.432,6.951 134.432,1.524 ; 134.823,45.72 U19.8@136.258,45.72 ; v1(135.204,74.549) 135.458,74.803 135.458,75.565 U17.8@136.258,75.565 ; U18.8@136.258,60.452 135.052,60.452 ; Q3.2@138.242,6.951 138.242,6.121 138.811,5.552 138.811,2.159 138.176,1.524 134.432,1.524 ; 10.226,43.175 10.668,42.733 14.181,42.733 ; 10.226,43.175 10.226,43.165 10.668,42.723 17.78,42.723 17.79,42.733 ; 14.181,42.733 17.79,42.733 ; 17.79,42.733 26.047,42.733 ; 26.047,42.733 30.002,42.733 ; 26.047,42.733 26.047,43.141 ; 36.737,42.733 Q9.2@37.912,43.908 ; 36.737,42.733 37.592,42.733 ; 37.592,42.733 37.912,43.053 Q9.2@37.912,43.908 ; 37.592,42.733 Q9.2@37.912,43.908 ; C52.2@102.464,72.39 102.616,72.39 102.616,74.165 C51.1@102.359,74.422 102.464,72.394 C52.2@102.464,72.39 ; C52.2@102.464,72.39 102.557,70.599 102.616,69.469 ; 128.147,55.372 128.147,56.824 130.556,59.233 133.071,59.233 134.29,60.452 135.052,60.452
  Bottom Layer w0.7: v1@11.179,26.159 C2.1@12.827,26.159 ; 13.846,26.159 15.24,24.765 U1.8@15.24,23.127 ; v1(105.156,54.585) 106.426,55.855 U12.8@106.426,57.553 ; v1@105.283,54.712 105.283,53.772 106.477,52.578 110.896,52.578 v1(111.912,53.594)
  Bottom Layer w1: R32.1@9.779,34.104 9.779,27.559 v1@11.179,26.159 ; C77.1@35.113,85.471 40.897,85.471 C76.1@41.021,85.347 ; U24.4@37.465,82.55 R217.1@37.465,85.41 ; 43.307,75.565 48.982,75.565 50.633,77.216 ; Q21.3@57.198,73.801 57.198,76.74 C83.2@57.928,77.47 53.046,77.47 C78.2@52.792,77.724 50.633,77.724 50.633,79.161 48.895,80.899 48.895,94.107 50.546,95.758 87.376,95.758 88.646,94.488 88.646,90.678 87.4,89.432 D9.1@86.233,89.432 ; 58.51,85.104 60.579,87.173 C79.2@60.579,88.813 ; U25.1@66.856,88.886 67.858,87.884 75.422,87.884 C81.2@77.47,89.932 ; v1(121.285,76.708) 124.206,76.708 127.762,80.264 ; v1(127.536,15.11) 127.536,10.055 Q1.2@130.368,7.223 ; v1@134.264,51.308 134.264,46.279 134.823,45.72
  Bottom Layer w2: D7.1@2.286,70.716 2.286,66.508 C67.2@7.493,61.301 16.171,61.301 C68.2@19.981,65.111 C72.2@30.692,65.111 32.218,65.111 36.195,69.088 ; R33.2@12.895,36.83 13.276,36.449 30.099,36.449 30.099,38.481 P12.9@29.972,38.608 34.163,38.608 ; 34.163,41.91 34.163,38.608 ; v1@35.326,38.608 34.163,38.608 ; U24.4@37.465,82.55 37.465,79.629 34.29,76.454 34.29,71.247 36.195,69.342 36.195,69.088 ; 41.595,72.263 39.37,72.263 38.989,71.882 36.195,69.088 ; R213.1@42.164,73.218 42.164,74.422 43.307,75.565 ; C79.2@60.579,88.813 61.301,89.535 63.878,89.535 64.527,88.886 U25.1@66.856,88.886 ; C81.2@77.47,89.932 77.87,89.532 C82.1@80.391,89.532 86.133,89.532 D9.1@86.233,89.432 ; v1(89.281,56.261) v1@96.012,56.261
  other v1: 49.149,46.482 134.366,51.435 96.139,56.134
pads on no net: U1.9 U2.9 U3.9 U4.9 U5.9 U10.7 U10.9 U11.4 U11.5 U11.6 U11.7 U11.9 U17.9 U18.9 U19.9 U20.9 U21.9 U22.9

## Silkscreen, mask and mechanical layers (free items; w line width, h text height)
Top Overlay:
  circle w0.254: c78.645,59.944 r2
  circle w0.254: c6.001,42.418 r2
  circle w0.254: c154.972,88.138 r2
  circle w0.254: c61.119,4.572 r2
  circle w0.254: c155.353,4.572 r2
  lines w0.254: 0.127,0 0.127,100 160.127,100 160.127,0 0.127,0

## Dimensions
160.127,100 to 160.127,0 on Mechanical 1
0.127,100 to 160.127,100 on Mechanical 1

## Text inside footprints (layer, text, board x,y; h text height)
C52: Top Overlay "+" at 108.257,73.14 h1.5 r180
C67: Top Overlay "+" at 8.243,52.326 h1.5 r90
C68: Top Overlay "+" at 20.731,56.136 h1.5 r90
C71: Top Overlay "+" at 43.93,51.945 h1.5 r90
C72: Top Overlay "+" at 31.442,56.136 h1.5 r90
C78: Top Overlay "+" at 43.817,76.974 h1.5
C79: Top Overlay "+" at 59.829,97.788 h1.5 r270
C81: Top Overlay "+" at 76.72,94.907 h1.5 r270
C83: Top Overlay "+" at 62.903,78.22 h1.5 r180
C86: Top Overlay "+" at 92.595,86.906 h1.5 r270
C87: Top Overlay "+" at 94.349,71.971 h1.5 r90
C88: Top Overlay "+" at 84.721,86.906 h1.5 r270
P1: Top Overlay "1" at 165.862,1.905 h1.27 r90; Top Overlay "2" at 163.322,1.905 h1.27 r90; Top Overlay "40" at 163.322,54.737 h1.27 r90; Top Overlay "39" at 165.862,54.737 h1.27 r90
P2: Top Overlay "39" at 54.356,5.08 h1.27; Top Overlay "40" at 54.356,7.62 h1.27; Top Overlay "2" at 1.524,7.62 h1.27; Top Overlay "1" at 1.524,5.08 h1.27
P4: Top Overlay "1" at 66.421,8.382 h1.27; Top Overlay "2" at 66.421,10.922 h1.27; Top Overlay "40" at 119.253,10.922 h1.27; Top Overlay "39" at 119.253,8.382 h1.27
P12: Top Overlay "10" at 31.496,40.64 h1.27; Top Overlay "9" at 31.496,38.1 h1.27; Top Overlay "1" at 17.78,38.1 h1.27; Top Overlay "2" at 17.272,40.64 h1.27
P13: Top Overlay "10" at 163.322,91.694 h1.27 r90; Top Overlay "9" at 165.862,91.694 h1.27 r90; Top Overlay "1" at 165.862,77.978 h1.27 r90; Top Overlay "2" at 163.322,77.47 h1.27 r90
U23: Top Overlay "3" at 43.553,71.866 h1.5 r180; Top Overlay "2" at 46.093,71.866 h1.5 r180; Top Overlay "1" at 48.383,71.866 h1.5 r180
U26: Top Overlay "1" at 87.511,74.094 h1.5; Top Overlay "3" at 87.511,76.54 h1.5